# Altium PCB TECLADO-G5-5A.pcbDoc.PcbDoc (part 1 of 4)
Units mil, origin at the board's own origin, x right, y up, seen from the top; angles counter-clockwise.
Board outline 3514 x 3456 mil, 2 copper layers (Top Layer, Bottom Layer); 59 components, 33 nets, 154 pads, 25 vias.
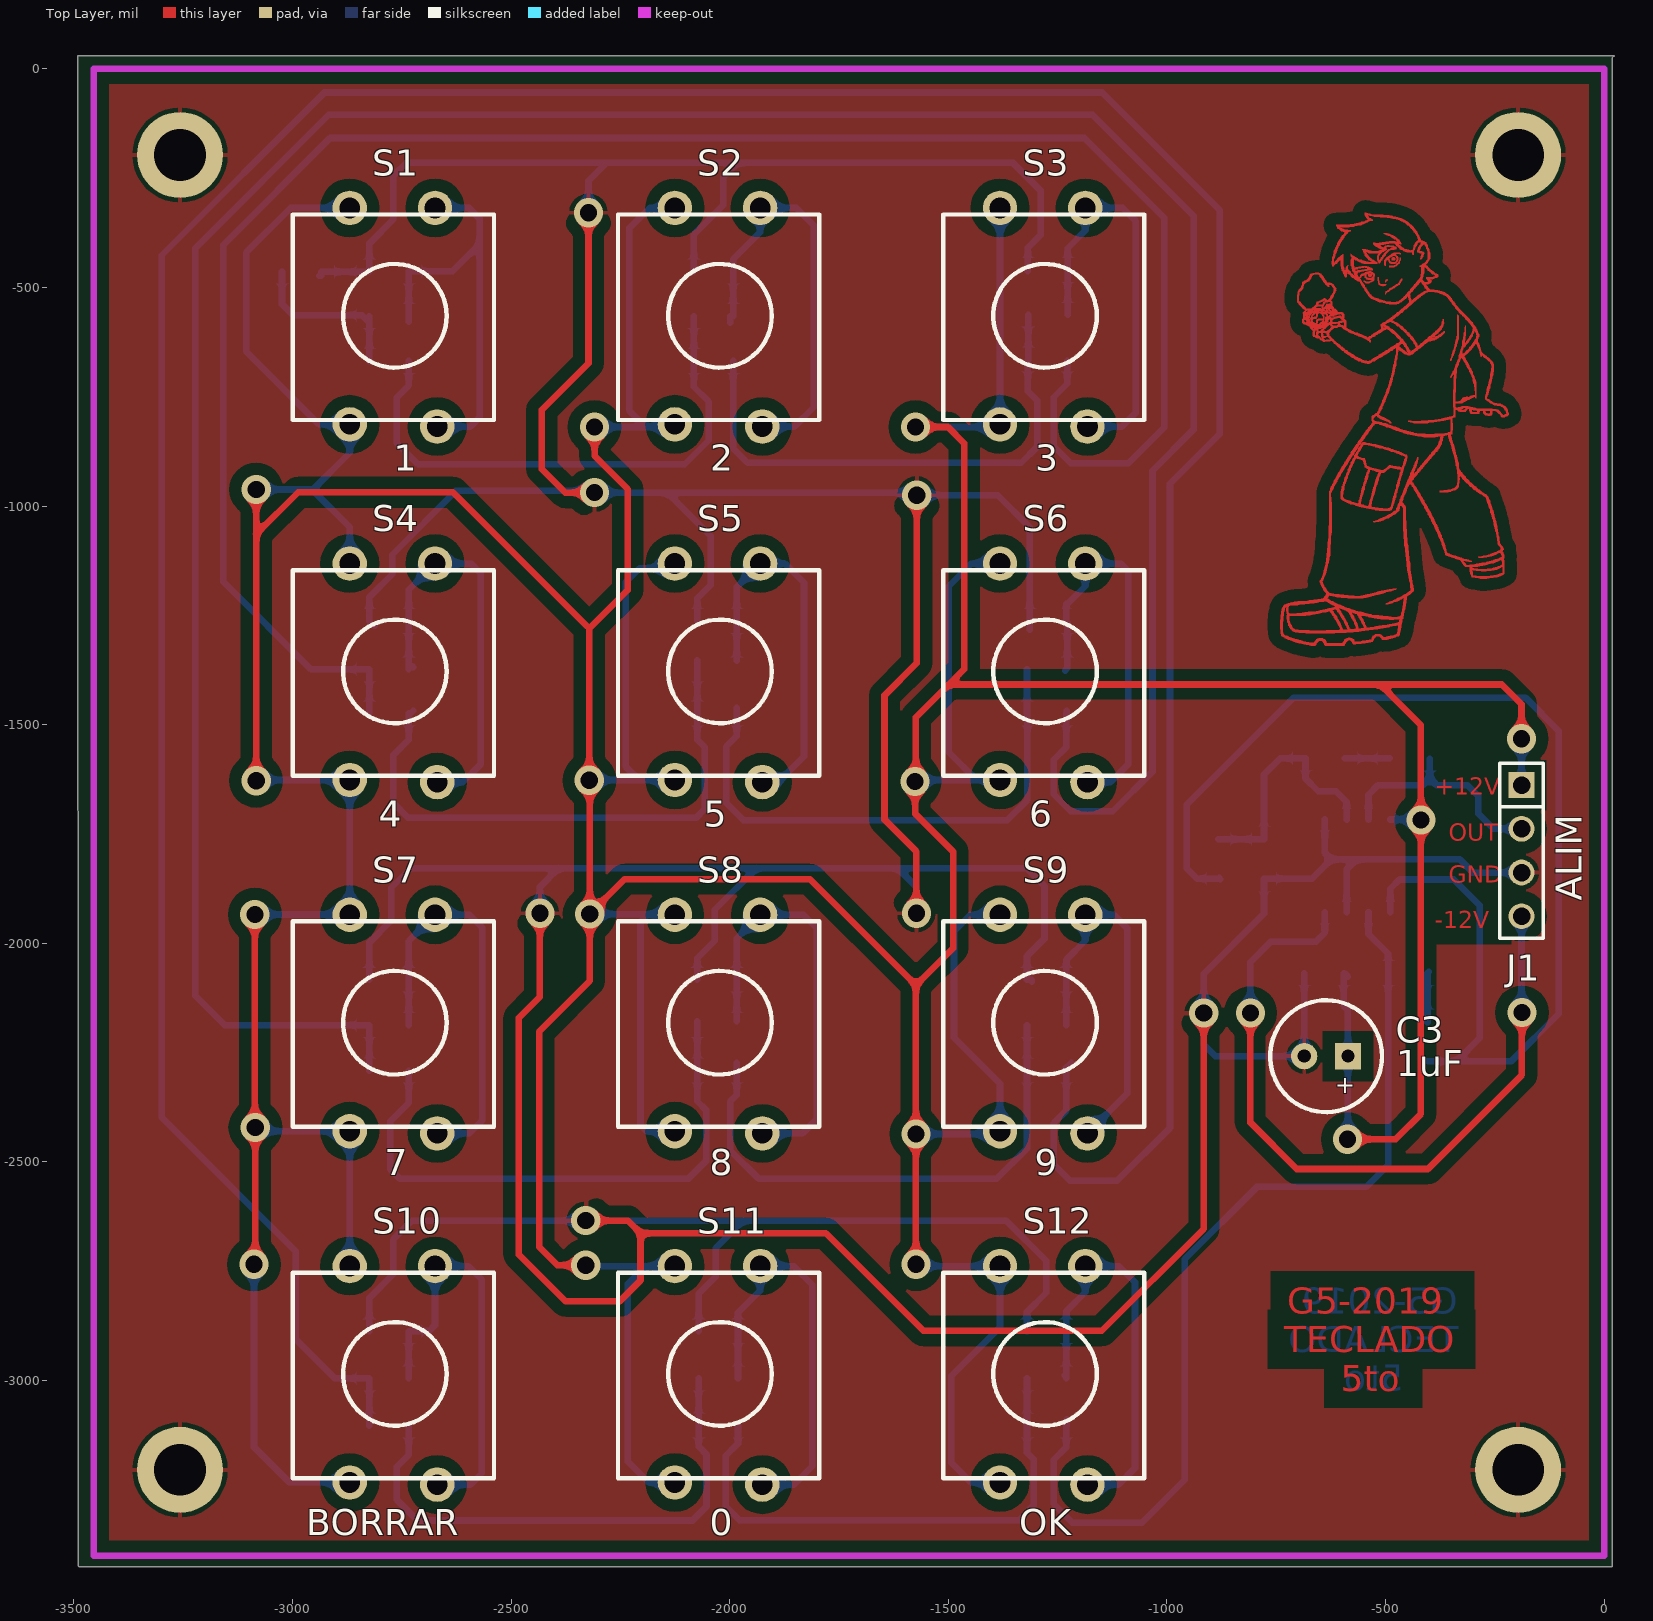
[diagram p0: Top Layer view]
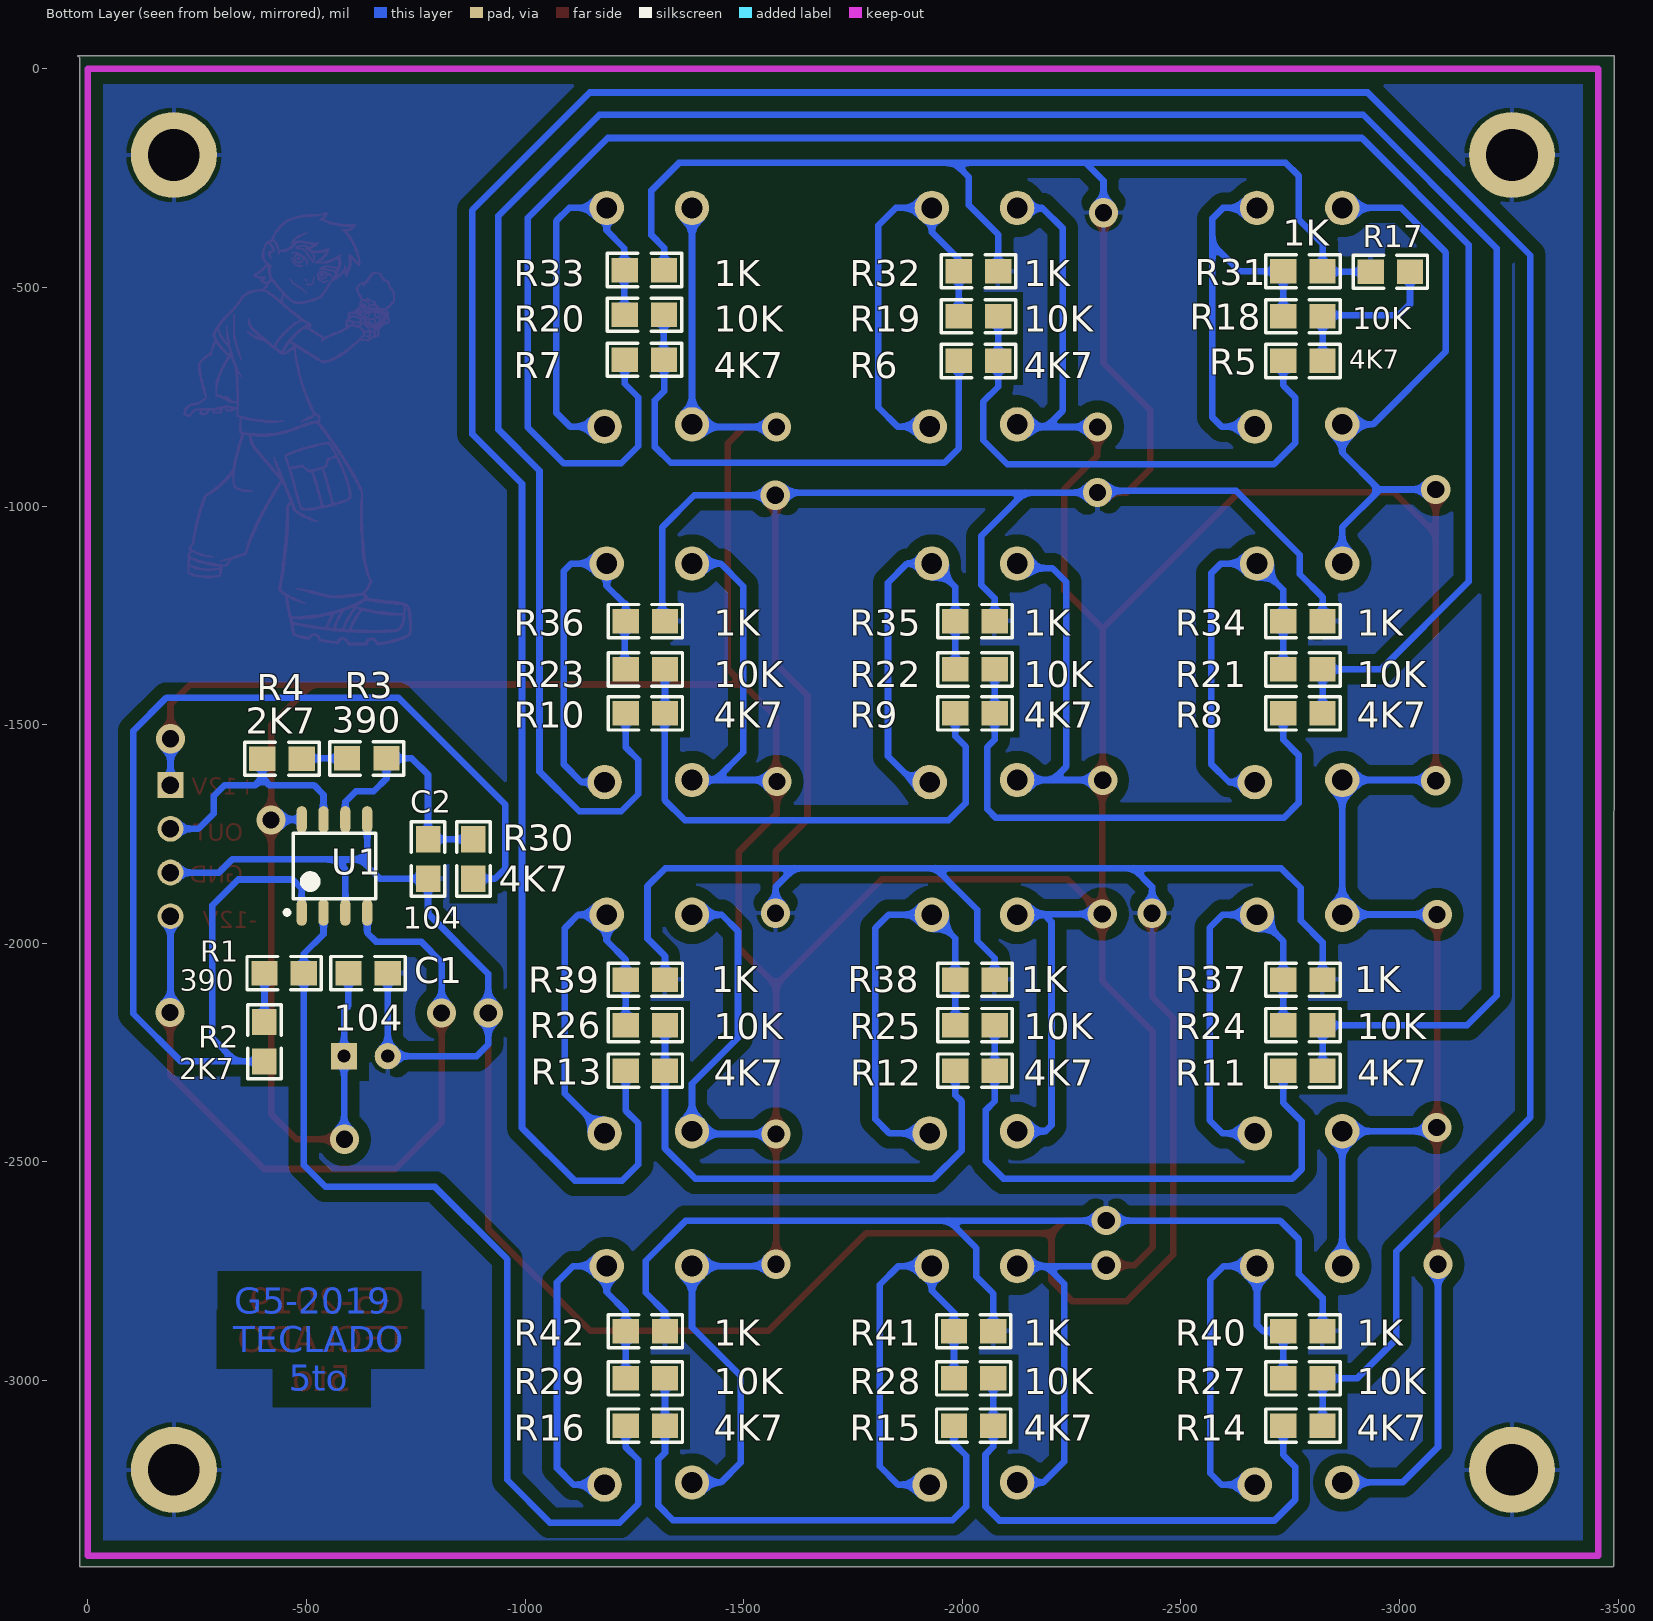
[diagram p1: Bottom Layer view, seen from below]
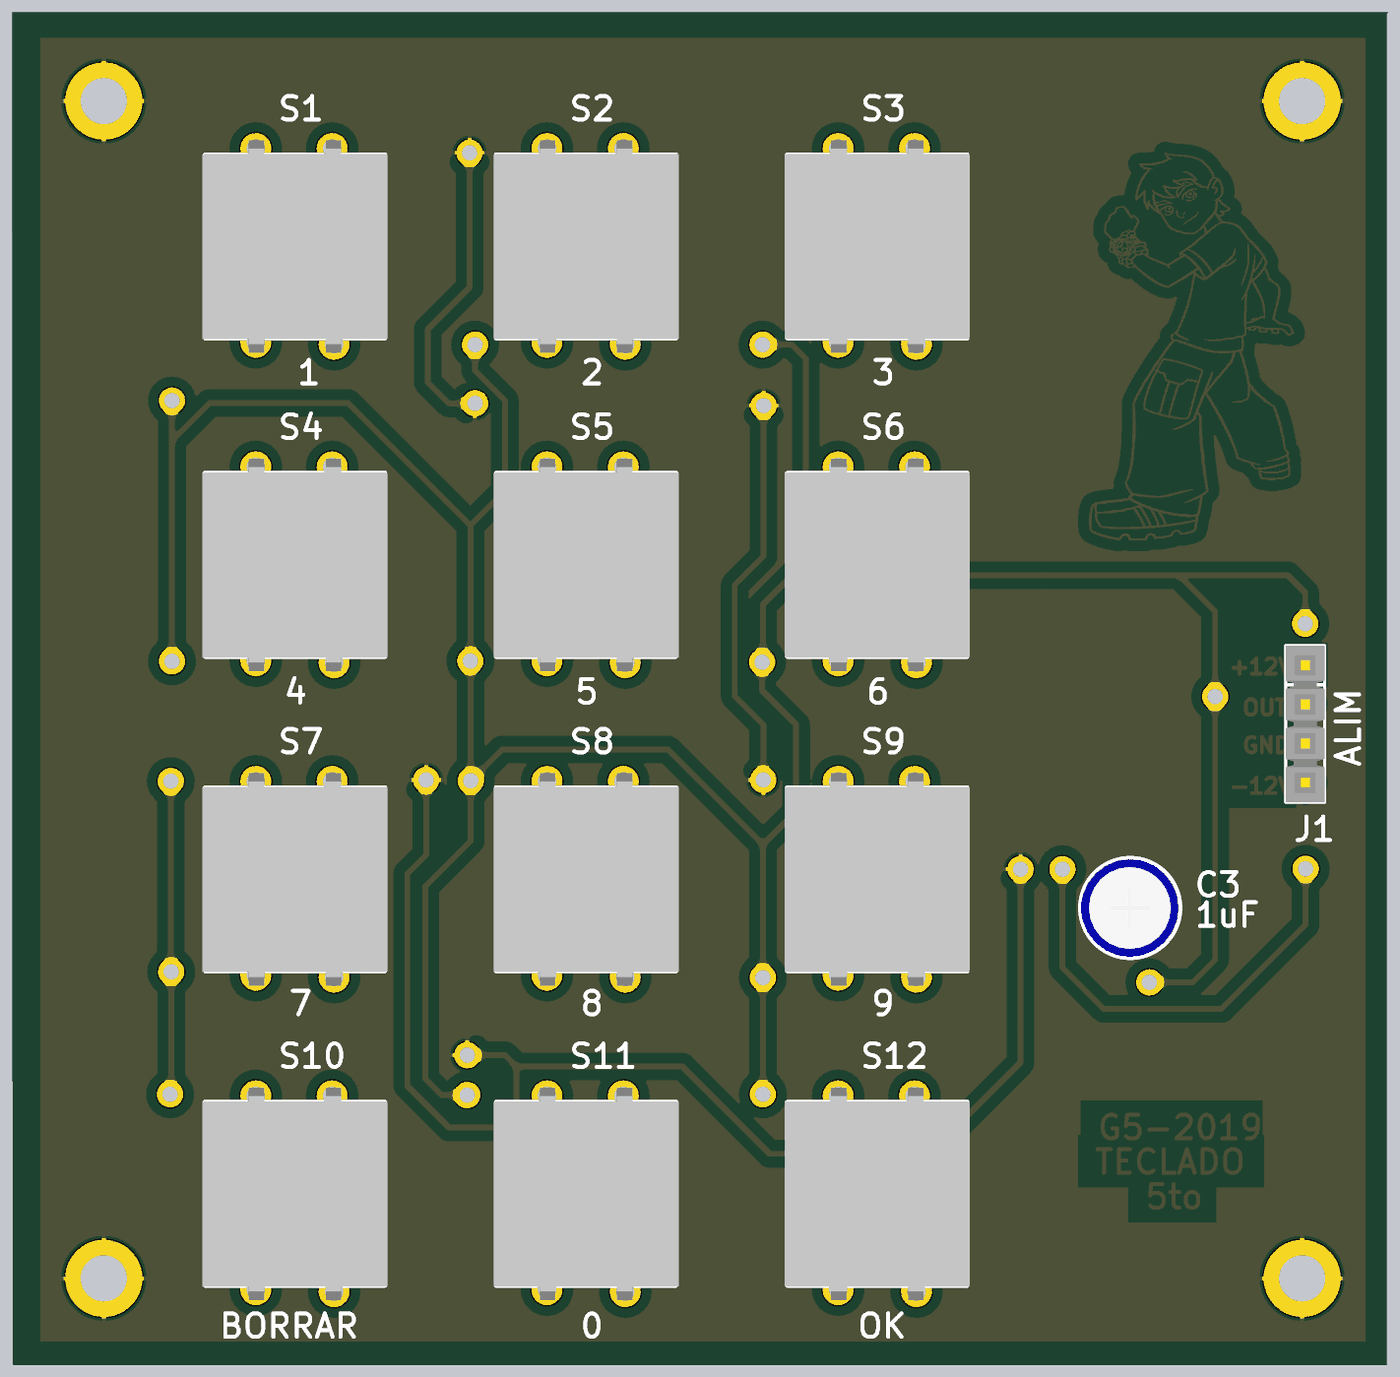
[diagram p5: 3D render of the assembled board from above, using the file's embedded part models]
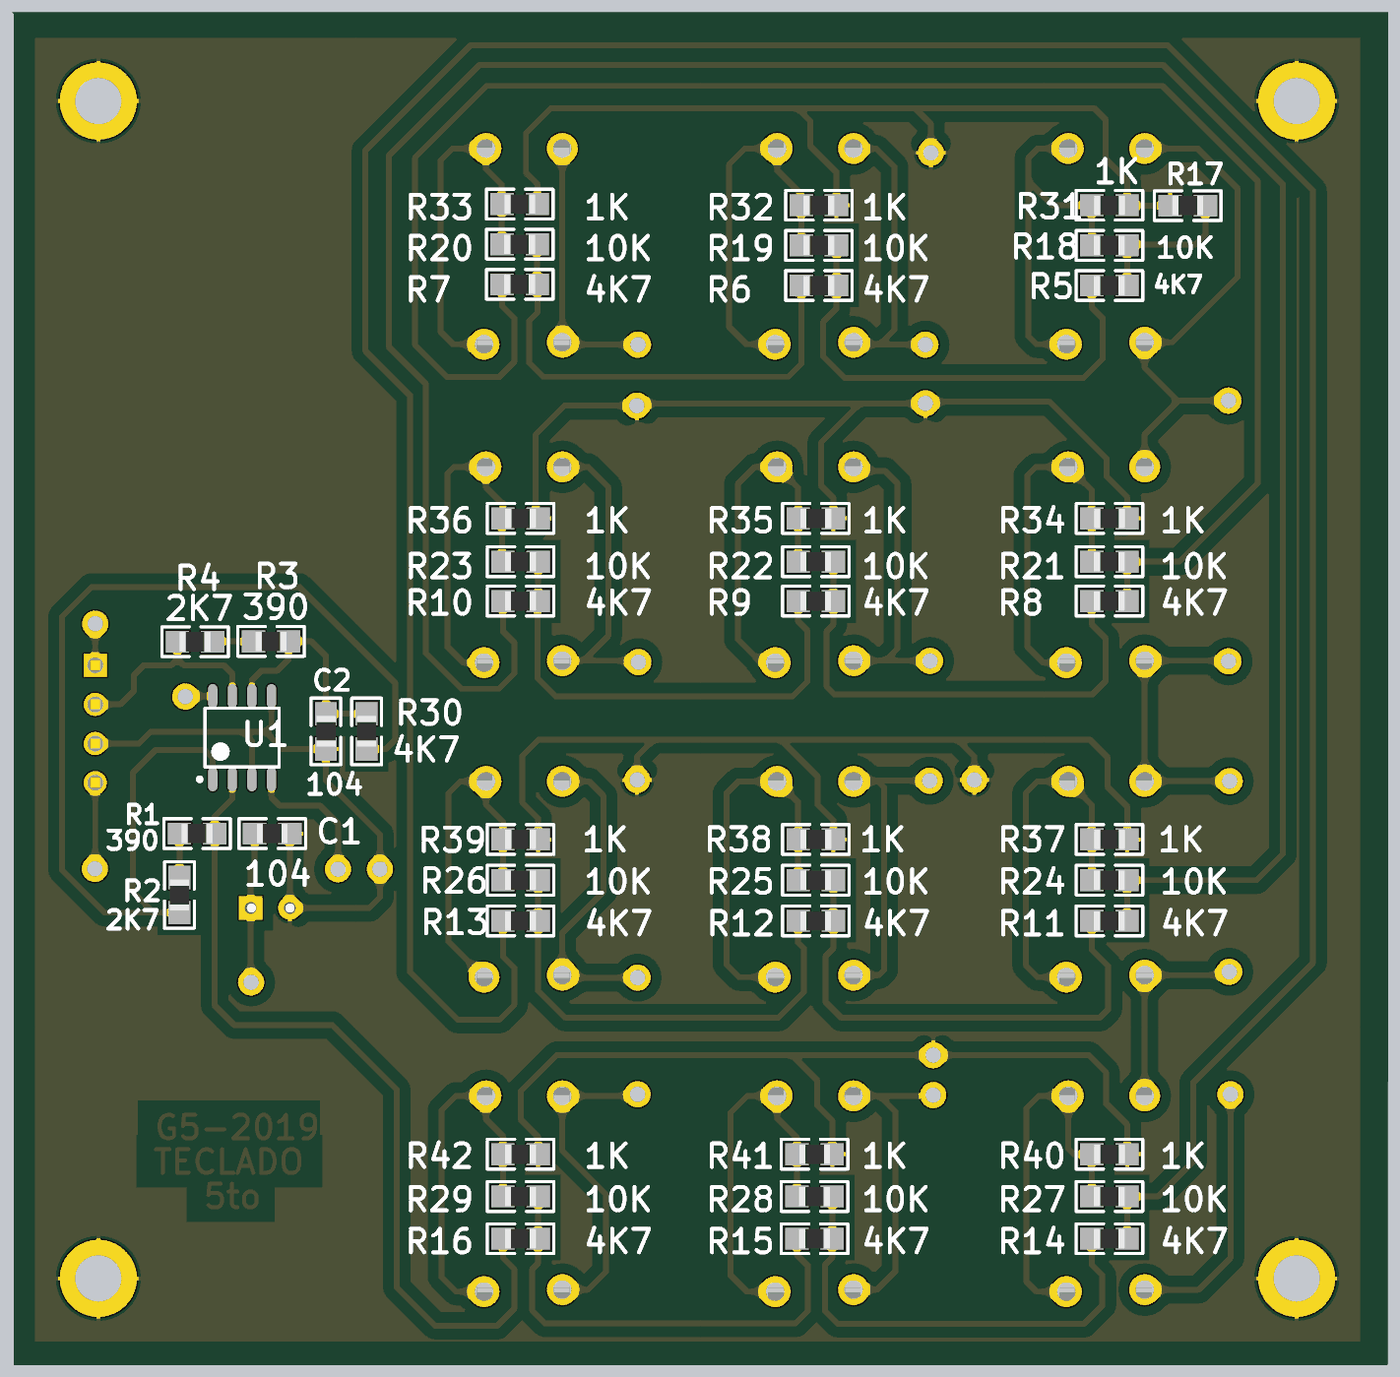
[diagram p6: 3D render of the assembled board from below, using the file's embedded part models]

## Layer stack, top to bottom
Top Solder: solder mask 0.4, Solder Resist, Dk 3.5
Top Layer: signal copper 1.4
Dielectric 1: dielectric 12.6, FR-4, Dk 4.8
Bottom Layer: signal copper 1.4
Bottom Solder: solder mask 0.4, Solder Resist, Dk 3.5

## Board outline
-3491,30 23,30 19,26 19,-3426 -3488,-3426 -3490,-3424

## Design rules (kind name [scope] priority, off if disabled: settings)
Clearance Clearance_polygon [InPolygon] p1: gap=27.56
Clearance [All] p2: gap=10
PolygonConnect [All] p1: connectstyle=Relief reliefconductorwidth=10 reliefentries=4 polygonreliefangle="90 Angle" airgapwidth=10
RoutingVias [All] p1: holewidth=28 width=50 viastyle="Through Hole" minholewidth=28 minwidth=50 maxholewidth=28 maxwidth=50
SolderMaskExpansion [All] p1: expansion=4
Width [All] p1: maxlimit=20 minlimit=10 preferedwidth=15 minimp=50.000000 maximp=50.000000 favimp=50.000000
30 further rules are at their usual default settings.

## Components (designator, comment, footprint, x,y, rotation, side; value= is the part's Value field where it differs from the comment)
C1 "104" 0805 -641,-2068 r180 bottom
C2 "104" 0805 -778,-1807 r270 bottom
C3 "1uF" Capol -636,-2258 r180 top
J1 "ALIM" SIP4 -189,-1788 r270 top
R1 "390" 0805 -449,-2068 r180 bottom
R2 "2K7" 0805 -404,-2225 r90 bottom
R3 "390" 0805 -638,-1577 r180 bottom
R4 "2K7" 0805 -444,-1578 r180 bottom
R5 "4K7" 0805 -2779,-668 r180 bottom
R6 "4K7" 0805 -2037,-668 r180 bottom
R7 "4K7" 0805 -1273,-665 r180 bottom
R8 "4K7" 0805 -2779,-1474 r180 bottom
R9 "4K7" 0805 -2029,-1474 r180 bottom
R10 "4K7" 0805 -1275,-1474 r180 bottom
R11 "4K7" 0805 -2779,-2291 r180 bottom
R12 "4K7" 0805 -2029,-2291 r180 bottom
R13 "4K7" 0805 -1275,-2291 r180 bottom
R14 "4K7" 0805 -2779,-3103 r180 bottom
R15 "4K7" 0805 -2026,-3103 r180 bottom
R16 "4K7" 0805 -1275,-3103 r180 bottom
R17 "" 0805 -2979,-464 r180 bottom
R18 "10K" 0805 -2779,-565.5 r180 bottom
R19 "10K" 0805 -2037,-565.5 r180 bottom
R20 "10K" 0805 -1273,-562.5 r180 bottom
R21 "10K" 0805 -2779,-1373.5 r180 bottom
R22 "10K" 0805 -2029,-1373.5 r180 bottom
R23 "10K" 0805 -1275,-1373.5 r180 bottom
R24 "10K" 0805 -2779,-2187 r180 bottom
R25 "10K" 0805 -2029,-2187 r180 bottom
R26 "10K" 0805 -1275,-2187 r180 bottom
R27 "10K" 0805 -2779,-2995 r180 bottom
R28 "10K" 0805 -2026,-2995 r180 bottom
R29 "10K" 0805 -1275,-2995 r180 bottom
R30 "4K7" 0805 -882,-1807 r270 bottom
R31 "1K" 0805 -2779,-463 r0 bottom
R32 "1K" 0805 -2037,-463 r0 bottom
R33 "1K" 0805 -1273,-460 r0 bottom
R34 "1K" 0805 -2779,-1263 r0 bottom
R35 "1K" 0805 -2029,-1263 r0 bottom
R36 "1K" 0805 -1275,-1263 r0 bottom
R37 "1K" 0805 -2779,-2083 r0 bottom
R38 "1K" 0805 -2029,-2083 r0 bottom
R39 "1K" 0805 -1275,-2083 r0 bottom
R40 "1K" 0805 -2779,-2887 r0 bottom
R41 "1K" 0805 -2026,-2887 r0 bottom
R42 "1K" 0805 -1275,-2887 r0 bottom
S1 "1" PUL_GRANDE -2999,-838 r90 top
S2 "2" PUL_GRANDE -2255.4,-838 r90 top
S3 "3" PUL_GRANDE -1511.8,-838 r90 top
S4 "4" PUL_GRANDE -2999,-1651.33 r90 top
S5 "5" PUL_GRANDE -2255.4,-1651.33 r90 top
S6 "6" PUL_GRANDE -1511.8,-1651.33 r90 top
S7 "7" PUL_GRANDE -2999,-2454.67 r90 top
S8 "8" PUL_GRANDE -2255.4,-2454.67 r90 top
S9 "9" PUL_GRANDE -1511.8,-2454.67 r90 top
S10 "BORRAR" PUL_GRANDE -2999,-3258 r90 top
S11 "0" PUL_GRANDE -2255.4,-3258 r90 top
S12 "OK" PUL_GRANDE -1511.8,-3258 r90 top
U1 "" "LM358 SMD" -564,-1823 r90 bottom

## Footprints (in the part's own frame and the unit in brackets; to place one, negate y for a bottom-side part, rotate by r counter-clockwise, add the part's x,y. Pads: shape width x height; smd on the part's side, far side on the other; paste and mask are expansions set on the pad)
0805 [mil] "Pasivo 0805"
  rect 60x56 smd: 1(-45,0) 2(45,0)
  silkscreen extent -85,-38 85,38, body extent -39,-25 39,25, height 15
Capol [mil] "Body diameter 6.5mm"
  rect 60x60 hole 30: 1(-50,0)
  round 60 hole 30: 2(50,0)
  silkscreen extent -128,-128 128,128, body extent -124,-125 126,125, height 454
"LM358 SMD" [mm]
  oval 1.55x0.6 smd: 1(-2.7,1.905) 2(-2.7,0.635) 3(-2.7,-0.635) 4(-2.7,-1.905) 5(2.7,-1.905) 6(2.7,-0.635) 7(2.7,0.635) 8(2.7,1.905)
  silkscreen extent -2.82,-2.41 1.91,2.88, body extent -2,-2.5 2,2.5, height 1.75
PUL_GRANDE [mm]
  round 2 hole 1.2: 1(0.635,-3.302) 2(13.208,-3.302) 3(0.508,-8.382) 4(13.208,-8.255)
  silkscreen extent 0.89,-11.68 12.83,0, body extent -0.04,-11.84 13.76,0.16, height 9.3
SIP4 [mil]
  rect 59.06x59.06 hole 40: 1(-150,0)
  round 59.06 hole 40: 2(-50,0) 3(50,0) 4(150,0)
  silkscreen extent -200,-50 200,50, body extent -200,-50 200,50, height 330

## Part data
C1 C2: library part CAP, "Diodo 0805"
C3: library part CAPPOL, "Cap polarizado"
J1: library part CON4
R1 R2 R3 R4 R5 R6 R7 R8 R9 R10 R11 R12 R13 R14 R15 R16 R17 R18 R19 R20 R21 R22 R23 R24 R25 R26 R27 R28 R29 R30 R31 R32 R33 R34 R35 R36 R37 R38 R39 R40 R41 R42: library part RES, "Resistencia"
S1 S2 S3 S4 S5 S6 S7 S8 S9 S10 S11 S12: library part Pulsador, "Pulsador"
U1: library part LM358

## Free pads (board coordinates)
  round 196.85 hole 118.11: 0(-3257.15,-3204.15) 0(-3257.15,-196.85) 0(-196.85,-3204.15) 0(-196.85,-196.85)

## Via types
v1: diameter 66.93, hole 39.37, Top Layer to Bottom Layer, 25 vias

## Nets (pads, with @x,y where several pads share a name; then routed paths per layer and width w, separated by ;. In a path a pad name is that pad's centre, name@x,y a point inside that pad or via, vN(x,y) a via of type N, cw(c..) or ccw(c..) an arc to the next point about the centre after c; other vN are vias at no path point)
12V: C1.1 C3.1 J1.1 S1.1 S1.2 S2.1 S2.2 S3.1 S3.2 S4.1 S4.2 S5.1 S5.2 S6.1 S6.2 S7.1 S7.2 S8.1 S8.2 S9.1 S9.2 S10.1 S10.2 S11.1 S11.2 S12.1 S12.2 U1.8 | length 20243
  Top Layer w15: v1(-3088,-2734) -3085,-2731 v1(-3085,-2421) -3086,-2420 v1(-3086,-1934) ; v1(-3083,-1628) -3083,-1064 ; v1(-3083,-962) -3083,-1064 ; v1(-2329,-2736) -2394,-2736 -2436,-2694 -2436,-2202 -2320,-2086 v1(-2320,-1933) ; -2326,-1275 -2633,-968 -2987,-968 -3083,-1064 ; v1(-2321,-1627) -2321,-1280 -2233,-1192 -2233,-961 -2309,-885 v1(-2309,-819) ; v1@-2314,-1625 -2320,-1631 v1(-2320,-1933) ; v1(-1576,-1630) -1576,-1703 -1489,-1790 -1489,-2011 -1574,-2096 ; v1(-1575,-819) -1501,-819 -1464,-856 -1464,-1373 -1499,-1408 ; v1(-1574,-2734) v1(-1574,-2436) -1574,-2096 ; v1@-1574,-1630 -1574,-1483 -1499,-1408 ; v1(-587,-2448) -477,-2448 -419,-2390 v1(-419,-1718) -419,-1501 -512,-1408 ; v1(-189,-1532) -189,-1453 -234,-1408 -512,-1408 ; v1(-2320,-1933) -2240,-1853 -1817,-1853 -1574,-2096 ; -1499,-1408 -512,-1408
  Bottom Layer w15: v1(-3088,-2734) -3088,-3152 -3007,-3233 S10.1@-2869,-3233 ; v1(-3086,-1934) -2869.67,-1934 S7.2@-2869,-1934.67 S4.1@-2869,-1626.33 -3085.67,-1626.33 -3083,-1623.67 v1(-3083,-1628) ; v1(-3083,-962) -2955,-962 -2954,-963 ; v1@-3061.33,-2429.67 S7.1@-2869,-2429.67 S10.2@-2869,-2738 ; S4.2@-2869,-1131.33 -2869,-1048 -2954,-963 ; S1.2@-2869,-318 -3004,-318 -3106,-420 -3106,-646 -2939,-813 S1.1@-2869,-813 -2869,-878 -2954,-963 ; v1(-2321,-1627) -2316.33,-1627 -2314,-1624.67 -2312.33,-1626.33 -2207,-1626.33 ; v1(-2320,-1933) S8.2@-2129.06,-1933 ; v1(-2309,-819) -2192,-819 ; -2294,-2738 -2192,-2738 ; S11.1@-2125.4,-3233 -2185,-3233 -2233,-3185 -2233,-2779 -2192,-2738 ; S11.2@-2125.4,-2738 -2192,-2738 ; S8.1@-2125.4,-2429.67 -2190.33,-2429.67 -2204,-2416 -2204,-1951 -2187.67,-1934.67 S8.2@-2125.4,-1934.67 ; S5.1@-2125.4,-1626.33 -2207,-1626.33 ; S5.2@-2125.4,-1131.33 -2136.06,-1142 -2206,-1142 -2238,-1174 -2238,-1595.33 -2207,-1626.33 ; S2.1@-2125.4,-813 -2131.4,-819 -2192,-819 ; S2.2@-2125.4,-318 -2125.9,-318.5 -2183.5,-318.5 -2230,-365 -2230,-781 -2192,-819 ; v1(-1575,-819) -1387.8,-819 S3.1@-1381.8,-813 S3.2@-1381.8,-318 ; v1(-1574,-2734) -1570,-2738 S12.2@-1381.8,-2738 -1381.8,-2877.8 -1493,-2989 -1493,-3188 -1448,-3233 S12.1@-1381.8,-3233 ; v1(-1574,-2436) -1398.13,-2436 -1393.13,-2441 S9.1@-1381.8,-2429.67 -1381.8,-2321.2 -1487,-2216 -1487,-1972 -1449.67,-1934.67 S9.2@-1381.8,-1934.67 ; v1@-1572.33,-1626.33 -1435.67,-1626.33 ; S6.1@-1381.8,-1626.33 -1435.67,-1626.33 ; S6.2@-1381.8,-1131.33 -1447.33,-1131.33 -1499,-1183 -1499,-1563 -1435.67,-1626.33 ; C1.1@-596,-2068 -596,-2143 -586,-2153 C3.1@-586,-2258 v1@-586,-2447 ; C1.1@-594,-2068 C1.1@-586,-2076 ; U1.8@-489,-1716.7 -420.3,-1716.7 v1(-419,-1718) ; J1.1@-189,-1638 v1(-189,-1532)
-12V: J1.4 U1.4 | length 1724.7
  Top Layer w15: v1@-802,-2165 -809,-2172 -809,-2410 -703,-2516 -403,-2516 -188,-2301 v1(-188,-2158)
  Bottom Layer w15: v1@-809,-2158 -809,-2043 -762,-1996 -659,-1996 -639,-1976 U1.4@-639,-1929.3 ; J1.4@-189,-1938 -189,-2157 v1(-188,-2158)
  other v1: -809,-2159
E1: R18.1 R31.2 S1.3 S1.4 | length 975.3
  Bottom Layer w15: R18.1@-2734,-578 R18.1@-2734,-565.5 R31.2@-2734,-463 -2634,-463 -2572,-401 ; S1.4@-2674,-318 -2596,-318 -2572,-342 -2572,-401 ; S1.3@-2669,-818 -2593,-818 -2572,-797 -2572,-401
E2: R19.1 R32.2 S2.3 S2.4 | length 978.6
  Bottom Layer w15: R19.1@-1999,-580.5 R19.1@-1999,-565.5 ; R19.1@-1992,-565.5 -1992,-435 -1930.4,-373.4 S2.4@-1930.4,-318 -1848,-318 -1808,-358 -1808,-774 -1852,-818 S2.3@-1925.4,-818
E3: R20.1 R33.2 S3.3 S3.4 | length 951.4
  Bottom Layer w15: R20.1@-1227,-562.5 -1227,-410 -1186.8,-369.8 S3.4@-1186.8,-318 -1101,-318 -1071,-348 -1071,-786 -1103,-818 S3.3@-1181.8,-818
E4: R21.1 R34.2 S4.3 S4.4 | length 937.7
  Bottom Layer w15: R21.1@-2734,-1373.5 R34.2@-2734,-1263 -2734,-1191.33 S4.4@-2674,-1131.33 -2591.67,-1131.33 -2569,-1154 -2569,-1590 -2610.33,-1631.33 S4.3@-2669,-1631.33 ; R21.1@-2726.25,-1365.75 R21.1@-2724,-1368
E5: R22.1 R35.2 S5.3 S5.4 | length 879.3
  Bottom Layer w15: R22.1@-1984,-1353 R35.2@-1984,-1263 -1984,-1184.93 S5.4@-1930.4,-1131.33 -1873.67,-1131.33 -1830,-1175 -1830,-1572 -1889.33,-1631.33 S5.3@-1925.4,-1631.33
E6: R23.1 R36.2 S6.3 S6.4 | length 922.2
  Bottom Layer w15: R23.1@-1233,-1376 -1228,-1371 -1228,-1266 R36.2@-1227.5,-1265.5 ; R36.2@-1230,-1263 -1230,-1223 -1226.79,-1223 -1186.8,-1183 S6.4@-1186.8,-1131.33 -1105.67,-1131.33 -1088,-1149 -1088,-1590 -1129.33,-1631.33 S6.3@-1181.8,-1631.33
E7: R24.1 R37.2 S7.3 S7.4 | length 1017.3
  Bottom Layer w15: R24.1@-2734,-2187 R37.2@-2734,-2083 -2734,-1994.67 S7.4@-2674,-1934.67 ; -2719,-1979.67 S7.4@-2674,-1934.67 ; S7.3@-2669,-2434.67 -2595.67,-2434.67 -2566,-2405 -2566,-1964 -2595.33,-1934.67 S7.4@-2674,-1934.67
E8: R25.1 R38.2 S8.3 S8.4 | length 982.4
  Bottom Layer w15: R25.1@-1984,-2178 R38.2@-1984,-2083 -1984,-1988.27 S8.4@-1930.4,-1934.67 -1831.33,-1934.67 -1801,-1965 -1801,-2402 -1833.67,-2434.67 S8.3@-1925.4,-2434.67
E9: R26.1 R39.2 S9.3 S9.4 | length 885.9
  Bottom Layer w15: R26.1@-1230,-2187 R39.2@-1230,-2083 -1230,-2037 -1186.8,-1993.8 S9.4@-1186.8,-1934.67 -1121.33,-1934.67 -1091,-1965 -1091,-2343.87 S9.3@-1181.8,-2434.67
E10: R27.1 R40.2 S10.3 S10.4 | length 964.4
  Bottom Layer w15: R27.1@-2734,-2995 R40.2@-2734,-2887 -2688,-2887 -2674,-2873 S10.4@-2674,-2758 ; S10.4@-2674,-2738 -2598,-2738 -2567,-2769 -2567,-3212 -2593,-3238 S10.3@-2669,-3238
E11: R28.1 R41.2 S11.3 S11.4 | length 962
  Bottom Layer w15: R28.1@-1981,-2995 R41.2@-1981,-2887 -1981,-2845 -1930.4,-2794.4 S11.4@-1930.4,-2738 -1854,-2738 -1811,-2781 -1811,-3196 -1853,-3238 S11.3@-1925.4,-3238
E12: R29.1 R42.2 S12.3 S12.4 | length 953.6
  Bottom Layer w15: R29.1@-1230,-2995 R42.2@-1230,-2887 -1230,-2841 -1186.8,-2797.8 S12.4@-1186.8,-2738 -1110,-2738 -1073,-2775 -1073,-3200 -1111,-3238 S12.3@-1181.8,-3238
GND: C1.2 C2.2 C3.2 J1.3 pad.0 R17.1 R31.1 R32.1 R33.1 R34.1 R35.1 R36.1 R37.1 R38.1 R39.1 R40.1 R41.1 R42.1 U1.3 U1.5 | length 16469.8
  Top Layer w15: v1(-2434,-1931) -2434,-2122 -2482,-2170 -2482,-2712 -2375,-2819 -2252,-2819 -2204,-2771 -2204,-2663 ; v1(-2329,-2634) -2233,-2634 -2204,-2663 ; v1(-2323,-329) -2323,-673 -2430,-780 -2430,-915 -2376,-969 v1(-2309,-969) ; v1(-1573,-1931) -1573,-1790 -1646,-1717 -1646,-1433 -1572,-1359 v1(-1572,-975) ; v1(-916,-2159) -916,-2653 -1149,-2886 -1557,-2886 -1780,-2663 -2204,-2663
  Bottom Layer w15: R17.1@-2939,-473 R17.1@-2934,-473 ; R17.1@-2934,-464 -2825,-464 R31.1@-2824,-463 -2824,-399 -2769,-344 -2769,-244 -2740,-215 -1982,-215 ; R40.1@-2824,-2887 -2824,-2811 -2770,-2757 -2770,-2677.5 -2726.5,-2634 v1(-2329,-2634) -1969,-2634 ; R37.1@-2824,-2083 -2824,-1998 -2774,-1948 -2774,-1873 -2729,-1828 -2391,-1828 ; R34.1@-2824,-1263 -2824,-1208 -2772,-1156 -2772,-1111 -2626,-965 -2313,-965 v1(-2309,-969) -2143,-969 ; R34.1@-2814,-1273 R34.1@-2812.13,-1273 ; v1(-2434,-1931) -2434,-1871 -2391,-1828 ; v1(-2323,-329) -2323,-256 -2285,-218 ; R32.1@-2082,-463 -2082,-379 -2015,-312 -2015,-248 -1982,-215 ; R38.1@-2074,-2083 -2074,-2034 -2034,-1994 -2034,-1923 -1939,-1828 ; R35.1@-2074,-1263 -2074,-1211 -2043,-1180 -2043,-1069 -2143,-969 ; R41.1@-2071,-2887 -2071,-2801 -2032,-2762 -2032,-2697 -1969,-2634 ; v1(-1573,-1931) -1573,-1871 -1616,-1828 ; R42.1@-1320,-2887 -1320,-2843 -1276,-2799 -1276,-2726 -1368,-2634 -1969,-2634 ; R39.1@-1320,-2083 -1320,-2029 -1280,-1989 -1280,-1869 -1321,-1828 -1616,-1828 ; R33.1@-1318,-463 -1318,-409 -1289,-380 -1289,-278 -1352,-215 -1982,-215 ; R36.1@-1314,-1283 -1314,-1048 -1387,-975 v1(-1572,-975) -1578,-969 -2143,-969 ; R39.1@-1309,-2088 R39.1@-1309,-2083 ; C1.2@-686,-2068 C3.2@-686,-2258 -889,-2258 -916,-2231 v1(-916,-2159) -916,-2070 -778,-1932 C2.2@-778,-1852 -668,-1852 -624,-1808 ; U1.5@-639,-1716.7 -639,-1793 -624,-1808 ; U1.3@-589,-1929.3 -589,-1831 -566,-1808 ; J1.3@-189,-1838 -300,-1838 -330,-1808 -566,-1808 ; -2391,-1828 -1939,-1828 ; -1939,-1828 -1616,-1828 ; -624,-1808 -566,-1808
NetC2_1: C2.1 R3.2 R30.1 U1.6 | length 565
  Bottom Layer w15: R30.1@-882,-1762 C2.1@-778,-1762 -778,-1614 -741,-1577 R3.2@-683,-1577 -683,-1623 -654,-1652 -613,-1652 -589,-1676 U1.6@-589,-1716.7
NetR1_1: R1.1 R2.2 | length 116.2
  Bottom Layer w15: R2.2@-404,-2180 R1.1@-404,-2068 R1.1@-401,-2065
NetR1_2: R1.2 R16.1 U1.2 | length 2219.8
  Bottom Layer w15: R16.1@-1230,-3103 -1230,-3152 -1259,-3181 -1259,-3282 -1216,-3325 -1057,-3325 -959,-3227 -959,-2722 -794,-2557 -544,-2557 -494,-2507 R1.2@-494,-2068 -494,-2024 -539,-1979 U1.2@-539,-1929.3 ; R16.1@-1229,-3103 R16.1@-1229,-3088
NetR2_1: R2.1 R30.2 U1.1 | length 2878
  Bottom Layer w15: R30.2@-882,-1852 -931,-1852 -955,-1828 -955,-1683 -710,-1438 -180,-1438 -104,-1514 -104,-2161 -213,-2270 -338,-2270 ; R30.2@-880.5,-1850.5 R30.2@-878,-1853 ; U1.1@-489,-1929.3 -489,-1875 -468,-1854 -344,-1854 -285,-1913 -285,-2217 -338,-2270 ; R2.1@-404,-2270 -338,-2270
NetR3_1: R3.1 R4.2 | length 103
  Bottom Layer w15: R3.1@-593,-1577 R4.2@-490,-1577
NetR5_1: R5.1 R6.2 R19.2 | length 1253.7
  Bottom Layer w15: R5.1@-2734,-668 -2734,-724 -2762,-752 -2762,-855 -2712.66,-904.34 -2103,-904.34 -2048,-849.34 -2048,-761 -2082,-727 R6.2@-2082,-668 R19.2@-2082,-565.5
NetR5_2: R5.2 R17.2 R18.2 | length 394.1
  Bottom Layer w15: R17.2@-3024,-464 -3024,-538 -2999,-563 -2841.5,-563 R18.2@-2824,-580.5 ; R5.2@-2824,-668 R18.2@-2824,-580.5 ; R18.2@-2824,-565.5 R18.2@-2824,-580.5
NetR6_1: R6.1 R7.2 R20.2 | length 1231.8
  Bottom Layer w15: R6.1@-1992,-668 -1992,-868 -1959,-901 -1333,-901 -1297,-865 -1297,-758 -1318,-737 R7.2@-1318,-668 ; R7.2@-1317,-665 R20.2@-1317,-562.5
NetR7_1: R7.1 R8.2 R21.2 | length 4607.4
  Bottom Layer w15: R8.2@-2824,-1474 R21.2@-2824,-1373.5 -2957.5,-1373.5 -3158,-1173 -3158,-402 -2914,-158 -1189,-158 -1006,-341 -1006,-820 -1088,-902 -1220,-902 -1259,-863 -1259,-751 -1228,-720 R7.1@-1228,-668
NetR8_1: R8.1 R9.2 R22.2 | length 1315.1
  Bottom Layer w15: R8.1@-2734,-1474 R8.1@-2734,-1478 ; R8.1@-2724,-1468 R8.1@-2734,-1478 ; R22.2@-2074,-1353 R22.2@-2074,-1373.5 R9.2@-2074,-1474 -2074,-1534 -2057,-1551 -2057,-1693 -2077,-1713 -2735,-1713 -2769,-1679 -2769,-1569 -2734,-1534 R8.1@-2734,-1478
NetR9_1: R9.1 R10.2 R23.2 | length 1256.7
  Bottom Layer w15: R9.1@-1984,-1461 R9.1@-1984,-1474 -1984,-1526 -2008,-1550 -2008,-1679 -1969,-1718 -1365,-1718 -1319,-1672 R10.2@-1319,-1468 ; R10.2@-1320,-1474 R23.2@-1320,-1373.5
NetR10_1: R10.1 R11.2 R24.2 | length 6537.6
  Bottom Layer w15: R11.2@-2824,-2291 R24.2@-2824,-2187 -3155,-2187 -3222,-2120 -3222,-410 -2917,-105 -1170,-105 -939,-336 -939,-825 -1033,-919 -1033,-1607 -1124,-1698 -1220,-1698 -1259,-1659 -1259,-1580 -1230,-1551 R10.1@-1230,-1474 ; R10.1@-1229,-1474 R10.1@-1229,-1468
NetR11_1: R11.1 R12.2 R25.2 | length 1317.3
  Bottom Layer w15: R11.1@-2734,-2291 -2734,-2365 -2776,-2407 -2776,-2517 -2755,-2538 -2094,-2538 -2054,-2498 -2054,-2381 -2074,-2361 R12.2@-2074,-2291 ; R25.2@-2074,-2178 R25.2@-2074,-2187 -2074,-2285.53 R12.2@-2071.26,-2288.26
NetR12_1: R12.1 R13.2 R26.2 | length 1222.7
  Bottom Layer w15: R12.1@-1984,-2273 R12.1@-1984,-2291 -1984,-2347 -1999,-2362 -1999,-2473 -1934,-2538 -1389,-2538 -1320,-2469 R13.2@-1320,-2291 R26.2@-1320,-2187
NetR13_1: R13.1 R14.2 R27.2 | length 8330.7
  Bottom Layer w15: R14.2@-2824,-3103 R27.2@-2824,-2995 -2903,-2995 -2993,-2905 -2993,-2704 -3299,-2398 -3299,-426 -2927,-54 -1148,-54 -879,-323 -879,-835 -993,-949 -993,-2422 -1114,-2543 -1222,-2543 -1259,-2506 -1259,-2411 -1230,-2382 R13.1@-1230,-2291 ; R13.1@-1233.5,-2287.5 R13.1@-1219,-2273
NetR14_1: R14.1 R15.2 R28.2 | length 1222.4
  Bottom Layer w15: R14.1@-2734,-3103 -2734,-3170 -2761,-3197 -2761,-3273 -2714,-3320 -2085,-3320 -2053,-3288 -2053,-3169 -2071,-3151 R15.2@-2071,-3103 R28.2@-2071,-2995
NetR15_1: R15.1 R16.2 R29.2 | length 1224.3
  Bottom Layer w15: R15.1@-1981,-3103 -1981,-3144 -2009,-3172 -2009,-3288 -1978,-3319 -1338,-3319 -1305,-3286 -1305,-3180 -1320,-3165 R16.2@-1320,-3103 R29.2@-1320,-2995
OUT: J1.2 R4.1 U1.7 | length 537.9
  Bottom Layer w15: U1.7@-539,-1716.7 -539,-1660 -517,-1638 -415,-1638 -399,-1622 ; R4.1@-399,-1578 -399,-1622 ; J1.2@-189,-1738 -253,-1738 -288,-1703 -288,-1663 -313,-1638 -383,-1638 -399,-1622
copper on no net: | length 47553